# Altium PCB Multimodal.PcbDoc (part 3 of 3)
Units mil, origin at the board's own origin, x right, y up, seen from the top; angles counter-clockwise.
Board outline 1182.8 x 2149.26 mil, 6 copper layers (L1_TOP, L2_GND, L3_Signal, L4_PWR, L5_GND, L6_BOTTOM), stack 44.646 mil thick; 156 components, 97 nets, 528 pads, 619 vias.
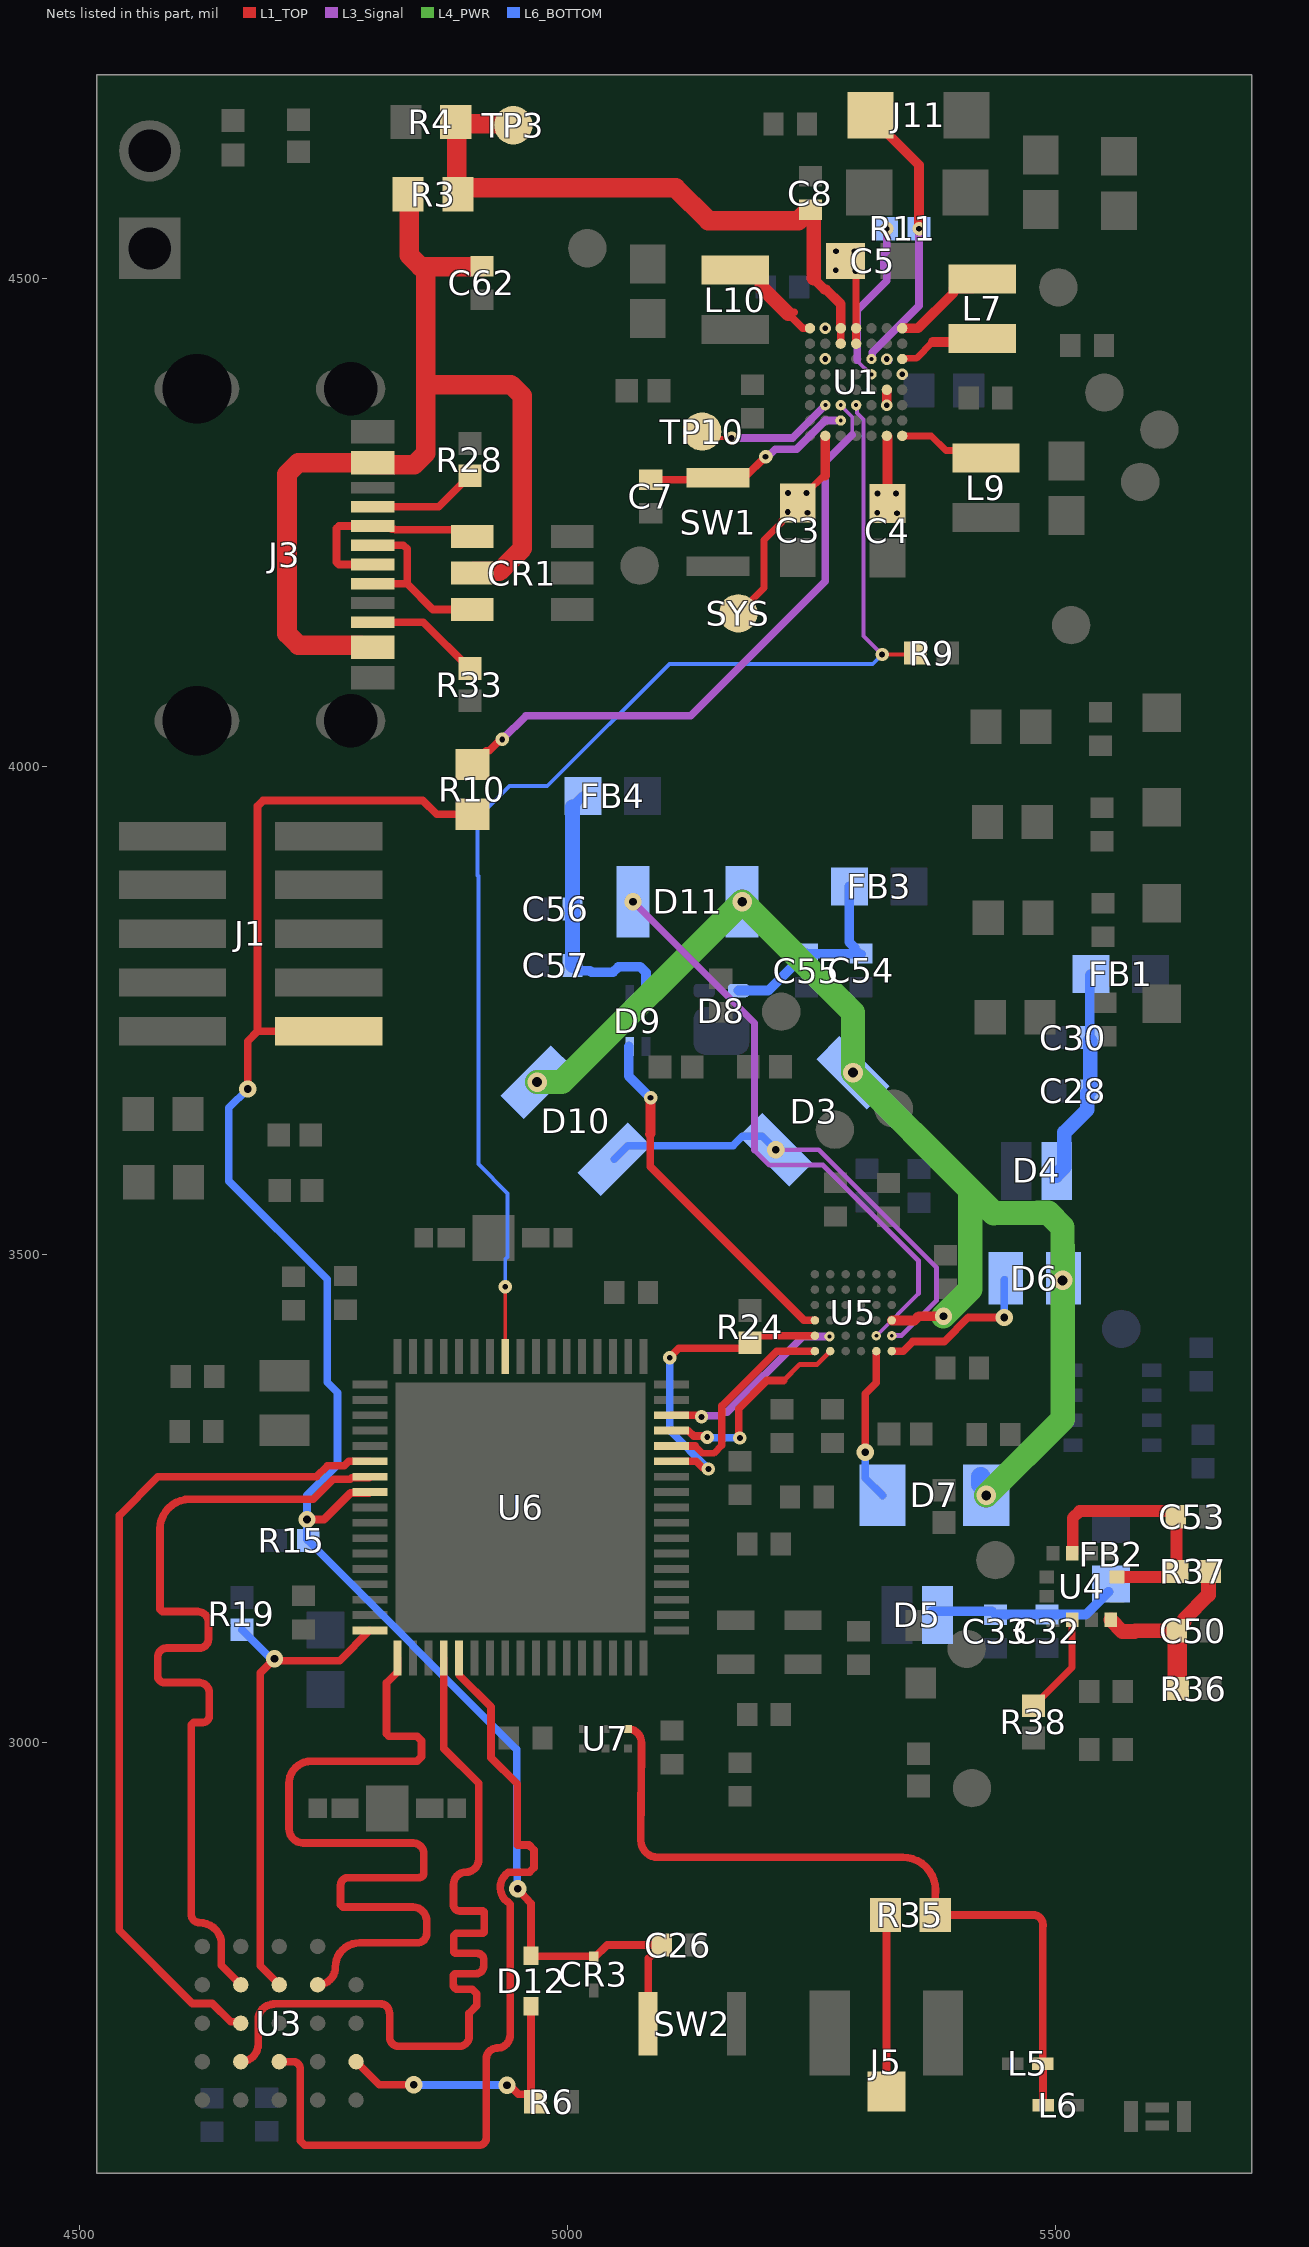
[diagram p7: the nets of this part, all layers, seen from the top]

## Via types
v1: diameter 17.72, hole 7.87, L1_TOP to L6_BOTTOM, tented both sides, 216 vias
v2: diameter 13.78, hole 5.91, L1_TOP to L6_BOTTOM, tented both sides, 93 vias
v3: diameter 17.72, hole 9.84, L1_TOP to L6_BOTTOM, 66 vias
v4: diameter 9.84, hole 3.94, L1_TOP to L2_GND, tented top, 49 vias
v5: diameter 20, hole 10, L1_TOP to L6_BOTTOM, tented both sides, 48 vias
v6: diameter 17.72, hole 7.87, L1_TOP to L6_BOTTOM, 46 vias
v7: diameter 9.84, hole 3.94, L2_GND to L3_Signal, tented top, 40 vias
v8: diameter 20, hole 12, L1_TOP to L6_BOTTOM, tented both sides, 30 vias
v9: diameter 11.81, hole 5.91, L3_Signal to L4_PWR, 20 vias
v10: diameter 11.81, hole 5.91, L1_TOP to L6_BOTTOM, tented both sides, 5 vias
v11: diameter 9.84, hole 3.94, L1_TOP to L2_GND, tented both sides, 3 vias
v12: diameter 17.72, hole 9.84, L1_TOP to L6_BOTTOM, tented both sides, 3 vias

## Nets (pads, with @x,y where several pads share a name; then routed paths per layer and width w, separated by ;. In a path a pad name is that pad's centre, name@x,y a point inside that pad or via, vN(x,y) a via of type N, cw(c..) or ccw(c..) an arc to the next point about the centre after c; other vN are vias at no path point) (continued)
NetJ3_A5: J3.A5 R28.2 | length 112.7
  L1_TOP w7.87: J3.A5@4800.48,4265.71 4868.05,4265.71 4899.8,4297.46 R28.2@4900,4297.46
NetJ3_B5: J3.B5 R33.2 | length 119.2
  L1_TOP w7.87: J3.B5@4800.48,4147.6 4852.28,4147.6 4899.8,4100.07 R33.2@4900,4100.07
NetL7_1: L7.1 U1.A1 | length 105.2
  L1_TOP w10: U1.A1@5342.9,4448.63 5359,4448.63 5395.35,4484.98 5395.35,4489.05 5414.86,4489.05 L7.1@5424.86,4499.05
NetL7_2: L7.2 U1.A3 | length 90.7
  L1_TOP w7: U1.A3@5342.9,4417.13 5343.6,4417.83 5357.29,4417.83 5374.09,4434.63
  L1_TOP w10: 5374.09,4434.63 5421.35,4434.63 L7.2@5424.86,4438.15
NetL9_1: L9.1 U1.A8 | length 73.4
  L1_TOP w7: U1.A8@5342.9,4338.39 5372.63,4338.39 5387.78,4323.25 5400.87,4323.25 L9.1@5407.37,4316.75
NetL10_2: L10.2 U1.G1 | length 113.4
  L1_TOP w7.87: 5226.24,4463.48 5227.83,4465.07 5231.97,4465.07
  L1_TOP w8: 5226.24,4463.48 5241.08,4448.64 U1.G1@5248.41,4448.63
  L1_TOP w15: L10.2@5171.86,4508.27 5191.38,4508.27 5198.88,4500.77 5198.88,4490.85 5226.24,4463.48
NetR10_2: R10.2 U1.E6 | length 636
  L1_TOP w4: R10.2@4902.6,4001.68 R10.2@4916.6,4015.68
  L1_TOP w7.87: R10.2@4916.6,4015.68 4919.81,4015.68 4931.53,4027.4 v2(4933.13,4027.4)
  L3_Signal w4: v4(5279.92,4369.92) 5279.91,4369.5 5291.72,4357.69 5291.72,4339.42
  L3_Signal w7.87: v2(4933.13,4027.4) 4957.54,4051.81 5126.32,4051.81 5264.16,4189.65 5264.16,4311.86 5291.72,4339.42
  other v7: 5279.92,4369.92
NetR24_1: R24.1 U5.A2 U6.46 | length 336.9
  L1_TOP w4: R24.1@5186.8,3409.24 R24.1@5186.99,3409.24
  L1_TOP w7.87: v2(5104.81,3394.1) 5104.81,3394.58 5114.01,3403.79 5186.77,3403.79 R24.1@5189.61,3406.63 ; U6.46@5106.39,3287.89 5132.02,3287.89 5138.75,3281.16 5143.26,3281.16 v2(5144.39,3280.03) ; R24.1@5192.23,3409.24 R24.1@5186.99,3409.24 5194.28,3416.53 U5.A2@5253.46,3416.53
  L6_BOTTOM w7.87: v2(5104.81,3394.1) 5104.81,3319.61 v2(5144.39,3280.03)
NetR38_2: R38.2 U4.8 | length 104.5
  L1_TOP w7: R38.2@5477.71,3037.57 5516.73,3076.58 U4.8@5516.73,3125.27
  L1_TOP w12: R38.2@5477.51,3037.57 R38.2@5477.71,3037.57 ; U4.8@5516.73,3125.27 U4.8@5517.04,3125.59
NetTP10_1: TP10.1 U1.F6 | length 142.9
  L1_TOP w4: TP10.1@5137.97,4342.84 5144.65,4336.16 v2(5168.08,4336.16)
  L3_Signal w7.87: v2(5168.08,4336.16) 5230.43,4336.16 v7@5264.16,4369.89
  other v4: 5264.13,4369.92
  other v7: 5264.13,4369.92
NetU5_A1: U5.A1 U6.47 | length 217
  L1_TOP w7: 5130.82,3303.56 5138.23,3296.15 5149.85,3296.15 5158.14,3304.44
  L1_TOP w7.87: U6.47@5106.39,3303.64 5106.47,3303.56 5130.82,3303.56 ; 5158.14,3304.44 5158.14,3344.52 5214.41,3400.78 U5.A1@5253.46,3400.78
NetU5_B1: U5.B1 U6.48 | length 222.4
  L1_TOP w5: 5221.34,3370.73 5237.88,3387.27 5255.69,3387.27 U5.B1@5269.2,3400.78
  L1_TOP w7.87: U6.48@5106.39,3319.39 5106.47,3319.31 5123.77,3319.31 5129.25,3313.83 5141.97,3313.83 v2(5143.1,3312.7) ; v2(5176.67,3311.79) 5175.27,3313.19 5175.27,3341.78 5204.22,3370.73 5221.34,3370.73
  L6_BOTTOM w7.87: v2(5143.1,3312.7) 5143.76,3312.04 5176.42,3312.04 v2(5176.67,3311.79)
NetU5_B2: U5.B2 U6.49 | length 196.8
  L1_TOP w7.87: U6.49@5106.39,3335.14 5133.94,3335.14 5135.66,3333.41 v2(5137.26,3333.41)
  L3_Signal w7.87: v2(5137.26,3333.41) 5138.31,3334.46 5155.96,3334.46 5159.89,3338.4 5163.78,3338.4 5241.11,3415.72 v7(5268.41,3415.72)
  other v4: 5268.41,3415.72
PD1_SPO2: D3.2 D10.2 U5.F2 | length 490.1
  L1_TOP w7.87: U5.F2@5332.2,3416.53 U5.F2@5332.2,3416.53
  L3_Signal w5: v1(5213.43,3607.13) 5257.19,3607.13 5377.82,3486.5 5377.82,3452.45 5341.98,3416.61 v4(5332.13,3416.61)
  L6_BOTTOM w7.87: D10.2@5047.88,3597.41 5061.75,3611.27 5169.49,3611.27 5179.22,3621 5199.57,3621 v1(5213.43,3607.13)
  other v7: 5332.13,3416.61
PD2_SPO2: D11.2 U5.E2 | length 615.9
  L3_Signal w4: v7@5316.45,3416.53 5359.56,3459.64 ; 5330.35,3521.57 5330.35,3521.69
  L3_Signal w5: 5191.4,3606.76 5206.87,3591.29 5261.7,3591.29 5359.56,3493.43 5359.56,3459.64
  L3_Signal w7: v1(5067.14,3861.22) 5191.4,3736.96 5191.4,3606.76
  other v4: 5316.45,3416.46
  other v7: 5316.45,3416.46
PD_CO2: D7.2 U5.E1 | length 159.9
  L1_TOP w7.87: v1(5305.02,3297.26) 5305.02,3356.93 5316.45,3368.36 U5.E1@5316.45,3400.78
  L6_BOTTOM w7.87: v1(5305.02,3297.26) 5305.02,3270.57 D7.2@5322.66,3252.93
PD_O2: D6.2 U5.F1 | length 170
  L1_TOP w7.87: U5.F1@5332.41,3400.78 5343.98,3400.78 5353.75,3410.55 5386.01,3410.55 5410.75,3435.29 v1(5447.38,3435.29)
  L6_BOTTOM w4.71: D6.2@5447.38,3473.79 D6.2@5448.97,3475.38
  L6_BOTTOM w7.87: v1(5447.38,3435.29) D6.2@5447.38,3473.79
PFN1: C7.1 SW1.2 U1.E7 | length 224.1
  L1_TOP w7.87: C7.1@5085.29,4293.58 5147.97,4293.58 SW1.2@5156.03,4301.64 ; SW1.2@5154.18,4295.4 5181.15,4295.4 5202.83,4317.08 v2(5202.89,4317.08)
  L3_Signal w7.87: v2(5202.89,4317.08) 5205.27,4317.08 5212.77,4324.58 5234.6,4324.58 5264.16,4354.14 v4(5279.92,4354.08)
  other v7: 5279.92,4354.08
PFN2: R9.1 U1.D6 U6.61 | length 1350.7
  L1_TOP w4: U6.61@4936.23,3395.05 v2(4936.23,3466.73) ; v2(5322.31,4114.4) 5355.23,4114.4 R9.1@5356.57,4115.75
  L3_Signal w4: v7@5295.66,4369.89 5296.76,4368.78 5296.76,4361.64 5303.26,4355.15 5303.26,4133.45 v2(5322.31,4114.4)
  L6_BOTTOM w4: v2(4936.23,3466.73) 4936.23,3495.03 4938.59,3497.39 4938.59,3562.4 4908.63,3592.35 4908.63,3887.37 4907.89,3888.12 4907.89,3946.95 4940.61,3979.67 4979.28,3979.67 5104.39,4104.78 5312.69,4104.78 v2(5322.31,4114.4)
  other v4: 5295.64,4369.92
  other v7: 5295.64,4369.92
QUAD_SPI_CSn: R19.1 U3.C2 U6.17 | length 505.3
  L1_TOP w7.87: U3.C2@4704.67,2751.63 4685.23,2771.07 4685.23,3071.06 v1(4699.8,3085.63) 4701.77,3083.66 4766.57,3083.66 U6.17@4797.57,3114.66
  L6_BOTTOM w7.87: R19.1@4666.34,3115.35 4666.54,3115.35 4696.26,3085.63 v1(4699.8,3085.63)
QUAD_SPI_IO0: U3.D3 U6.6 | length 868.5
  L1_TOP w7.87: U3.D3@4665.22,2712.64 4664.1,2713.76 4654.9,2713.76 4636.15,2732.51 4615.79,2732.51 4540.64,2807.66 4540.64,2839.48 4540.64,3232.31 4580.42,3272.09 4742.82,3272.09 4754.21,3283.48 4771.42,3283.48 4775.83,3287.89 U6.6@4797.57,3287.89
QUAD_SPI_IO1: U3.D2 U6.7 | length 882
  L1_TOP w7.87: U3.D2@4665.3,2751.63 4645.25,2771.68 4645.25,2797.43 ccw(c4623.02,2792.48) 4623.02,2815.26 cw(c4623.02,2823.71) 4614.56,2823.71 4614.56,3017.83 4617.09,3020.36 4626.28,3020.36 ccw(c4626.28,3027.18) 4633.09,3027.18 4633.09,3050.62 ccw(c4622.49,3050.62) 4622.49,3061.23 4586.94,3061.23 cw(c4586.94,3067.98) 4580.2,3067.98 4580.2,3087.15 cw(c4589.63,3087.15) 4589.63,3096.58 4622.89,3096.58 ccw(c4622.89,3105.89) 4632.2,3105.89 4632.2,3122.86 ccw(c4621.08,3122.86) 4621.08,3133.97 4585.04,3133.97 4582.51,3136.5 4582.51,3218.5 cw(c4613.1,3218.5) 4613.1,3249.09 4739.62,3249.09 4759.94,3269.41 4777.14,3269.41 4778.89,3271.16 4796.59,3271.16 U6.7@4797.57,3272.14
QUAD_SPI_IO2: U3.C4 U6.22 | length 873.3
  L1_TOP w4.31: 4940.76,2819.43 cw(c4936.92,2817.48) 4941.23,2817.51
  L1_TOP w5: 4948.4,2895.17 ccw(c4948.4,2896.4) 4949.63,2896.4
  L1_TOP w7.87: U3.C4@4704.67,2672.89 4718.79,2672.89 cw(c4718.79,2665.49) 4726.19,2665.49 4726.19,2591.87 4730.8,2587.26 4909.1,2587.26 ccw(c4909.1,2594.99) 4916.82,2594.99 4916.82,2675.79 cw(c4927.85,2675.79) 4927.85,2686.82 ccw(c4927.85,2700.2) 4941.23,2700.2 4941.23,2817.51 ; U6.22@4888.99,3086.24 4889.07,3086.16 4889.07,3068.86 4921.66,3036.26 4921.66,2984.29 4948.4,2957.56 4948.4,2896.4 4948.4,2895.17 ; 4938.15,2836.82 cw(c4949.63,2851.33) 4939.47,2866.79 4961,2866.79 4965.61,2871.4 4965.61,2889.81 4960.55,2894.87 4948.69,2894.87 ; 4938.69,2836.67 cw(c4933.62,2830.65) 4939.23,2836.17 4941.49,2833.87 4941.49,2817.42
QUAD_SPI_IO3: U3.D4 U6.21 | length 867.8
  L1_TOP w7.87: U3.D4@4665.3,2672.89 ccw(c4665.3,2690.74) 4683.16,2690.74 4683.16,2716 cw(c4698.77,2716) 4698.77,2731.6 ; 4698.4,2732.07 4698.77,2732.07 ; 4699.74,2732.12 4808.42,2732.12 cw(c4808.42,2723.1) 4817.44,2723.1 ; 4817.89,2722.47 4817.89,2697.53 ccw(c4826.7,2697.53) 4826.7,2688.72 4889.27,2688.72 ccw(c4889.27,2698.63) 4899.18,2698.63 4899.18,2722.58 4907.04,2730.43 4907.04,2742.56 4902.43,2747.17 4892.89,2747.17 4887.44,2747.17 cw(c4887.44,2751.53) 4883.08,2751.53 4883.08,2760.55 cw(c4885.61,2760.55) 4885.61,2763.07 4906.53,2763.07 ccw(c4906.53,2770.68) 4914.13,2770.68 4914.13,2777.17 ccw(c4907.45,2777.17) 4907.45,2783.85 4886.01,2783.85 cw(c4886.01,2786.37) 4883.49,2786.37 4883.49,2801.87 4886.01,2804.39 4912.33,2804.39 ccw(c4912.33,2806.92) 4914.86,2806.92 4914.86,2824.77 ccw(c4912.33,2824.77) 4912.33,2827.29 4889.52,2827.29 cw(c4889.52,2833.6) 4883.21,2833.6 4883.21,2854.26 cw(c4895.96,2854.26) 4895.96,2867 ccw(c4895.96,2879.99) 4908.95,2879.99 4908.95,2958.01 4873.24,2993.72 U6.21@4873.24,3086.24
QUAD_SPI_SCK: U3.B2 U6.18 | length 870.8
  L1_TOP w7.87: U3.B2@4744.04,2751.63 ccw(c4744.04,2769.78) 4762.2,2769.78 cw(c4787.02,2769.78) 4787.02,2794.6 4846.21,2794.6 ccw(c4846.21,2804.11) 4855.71,2804.11 4855.71,2817.03 ccw(c4841.49,2817.03) 4841.49,2831.26 4770.03,2831.26 4767.51,2833.78 4767.51,2853.53 cw(c4775.39,2853.53) 4775.39,2861.41 4847.85,2861.41 ccw(c4847.85,2866.46) 4852.9,2866.46 4852.9,2885.67 ccw(c4841.67,2885.67) 4841.67,2896.89 4729.56,2896.89 cw(c4729.56,2911.76) 4714.69,2911.76 4714.69,2957.92 cw(c4737.49,2957.92) 4737.49,2980.72 4845.81,2980.72 4850.42,2985.33 4850.42,3001.8 4845.81,3006.41 4817.15,3006.41 4814.63,3008.93 4814.63,3060.99 4826,3072.35 U6.18@4826,3086.24
RED: D9.2 U5.A3 | length 366.4
  L1_TOP w7.87: 5084.65,3622.94 5084.65,3589.89 5242.26,3432.28 U5.A3@5253.46,3432.28
  L1_TOP w10: 5084.65,3622.94 5085.06,3623.36 v2(5085.06,3660.3)
  L6_BOTTOM w10: D9.2@5062.71,3712.75 5062.71,3682.66 v2(5085.06,3660.3)
RF_CONN_IN: J5.1 R35.1 | length 181.1
  L1_TOP w7.87: J5.1@5326.73,2642.1 R35.1@5326.73,2823.18
RF_FIL_OUT: L5.1 L6.2 R35.2 U7.1 | length 778.9
  L1_TOP w7.87: U7.1@5061.89,3013.68 cw(c5061.89,2999.71) 5075.87,2999.71 5075.87,2998.59 5075.13,2899.58 ccw(c5092.43,2899.58) 5092.43,2882.28 5343.32,2882.28 cw(c5343.32,2848.61) 5376.99,2848.61 5376.99,2846.35 ; 5376.84,2845.76 R35.2@5376.84,2823.18 5469.21,2823.18 5477.08,2823.18 cw(c5477.08,2813.23) 5487.03,2813.23 5487.03,2812.33 ; 5486.88,2812.33 L5.1@5486.88,2670.62 5487.17,2670.34 5487.17,2628.58 L6.2@5487.45,2628.3
rst_flash: D12.2 R6.1 U3.A4 | length 292
  L1_TOP w7.87: U3.A4@4783.41,2672.89 4807.04,2649.26 v1@4840.5,2649.26 ; v1(4937.98,2648.61) 4940.64,2648.61 4949.83,2639.42 4959.31,2639.42 R6.1@4962.63,2636.09 ; D12.2@4962.63,2729.64 4962.63,2639.42 R6.1@4962.63,2636.09 ; R6.1@4966.88,2631.85 R6.1@4962.63,2636.09
  L6_BOTTOM w7.87: v1(4842.47,2649.26) 4842.79,2648.94 4937.65,2648.94 v1(4937.98,2648.61)
RST_MCU: C26.1 CR3.1 D12.1 J1.10 R10.1 R15.1 SW2.2 U6.8 | length 1946.8
  L1_TOP w7.87: v1(4672.35,3669.26) 4672.35,3718.31 4682.44,3728.4 ; v1(4733.07,3228.39) 4733.18,3228.27 4750.55,3228.27 4777.69,3255.41 4796.59,3255.41 U6.8@4797.57,3256.4 ; J1.10@4755.51,3728.4 4682.44,3728.4 ; R10.1@4902.6,3950.68 4865.97,3950.68 4851.79,3964.87 4688.14,3964.87 4682.44,3959.17 4682.44,3728.4 ; v1(4948.9,2850.06) 4962.63,2834.94 D12.1@4962.63,2781.61 ; D12.1@4963.37,2780.82 CR3.1@5027.05,2780.82 ; CR3.1@5027.05,2778.76 5040.68,2792.39 C26.1@5096.48,2792.39 5096.48,2791.01 5088.2,2782.73 5086.83,2782.73 5082.58,2778.49 SW2.2@5082.58,2711.88
  L6_BOTTOM w7.87: v1(4672.35,3669.26) 4653.08,3650 4653.08,3575.09 4753.84,3474.33 4753.84,3368.82 4764.45,3358.21 4764.45,3284.54 4733.07,3253.15 v1(4733.07,3228.39) 4733.07,3207.88 R15.1@4734.25,3206.69 4734.25,3206.5 4948.14,2992.61 4948.14,2874.65 ccw(c4956.01,2874.65) 4948.14,2874.41 v1(4948.9,2850.06)
SYS: C3.1 C4.1 C5.1 SYS.1 U1.A4 U1.B3 U1.B5 U1.B6 U1.B8 U1.D1 U1.D2 U1.F1 U1.F3 U1.F8 | length 436.5
  L1_TOP w7: SYS.1@5175.08,4156.57 5201.16,4182.65 5201.16,4231.77 5219.12,4249.73 5219.12,4251.31 5226.14,4258.33 C3.1@5226.14,4259.9 ; v9(5225.75,4260.3) 5235.06,4269.61 C3.1@5235.85,4269.61 ; C3.1@5235.85,4271.19 5244.51,4279.85 v4(5244.84,4279.85) ; C3.1@5245.3,4279.06 5245.3,4280.63 5262.59,4297.92 5264.16,4297.92 ; C5.1@5274.79,4526.97 C5.1@5284.55,4517.22 ; C5.1@5284.87,4517.54 5295.66,4506.75 U1.D1@5295.66,4448.63 ; C5.1@5288.47,4513.3 5288.47,4510.03 5293.55,4510.03 C5.1@5294.14,4509.44 ; C4.1@5327.72,4269.13 5327.72,4279.53 5336.68,4279.53 5338,4278.21 C4.1@5332.62,4272.83
  L1_TOP w8: U1.D2@5295.66,4432.88 U1.D1@5295.66,4448.63
  L1_TOP w10: 5264.16,4297.92 U1.F8@5264.16,4338.39 ; U1.B6@5326.6,4370.02 5327.03,4370.45 5327.03,4385.52 U1.B5@5327.15,4385.64 ; U1.B8@5327.44,4338.27 5327.27,4338.1 5327.72,4337.65 C4.1@5327.72,4279.53
  L3_Signal w10: v9(5327.15,4417.12) 5327.59,4416.67 v7@5327.59,4416.22 ; v7@5327.53,4416.15 v7@5327.59,4416.22 ; v7@5328.07,4416.22 v7@5327.59,4416.22
  other v4: 5337.56,4259.06 5225.75,4260.3 5245.93,4259.66 5317.38,4259.7 5317.6,4279.23 5336.47,4279.25 5225.97,4279.83 5327,4369.83 5342.89,4401.4 5264.13,4417.16 5327.15,4417.12 5264.13,4448.59 5295.08,4507.42 5274.89,4508.05 5275.12,4527.59 5293.99,4527.6
  other v7: 5337.56,4259.06 5225.75,4260.3 5245.93,4259.66 5317.38,4259.7 5317.6,4279.23 5336.47,4279.25 5225.97,4279.83 5244.84,4279.85 5327,4369.83 5342.89,4401.4 5264.13,4417.16 5327.15,4417.12 5264.13,4448.59 5295.08,4507.42 5274.89,4508.05 5275.12,4527.59 5293.99,4527.6
  other v9: 5337.56,4259.06 5245.93,4259.66 5317.38,4259.7 5317.6,4279.23 5336.47,4279.25 5225.97,4279.83 5244.84,4279.85 5327,4369.83 5342.89,4401.4 5264.13,4417.16 5264.13,4448.59 5295.08,4507.42 5274.89,4508.05 5275.12,4527.59 5293.99,4527.6
THM: J11.1 R11.2 U1.C3 | length 299.4
  L1_TOP w10: J11.1@5303.22,4672.8 5360.11,4615.91 v2(5360.11,4550.6)
  L3_Signal w7.87: v4(5311.36,4417.19) 5312.29,4418.11 5312.29,4423.83 5360.11,4471.66 v2(5360.11,4550.6)
  other v7: 5311.36,4417.19
TPU: R11.1 U1.C4 | length 170.7
  L3_Signal w4: 5296.86,4415.93 5296.86,4415.28 5310.78,4401.37 v4(5311.39,4401.37)
  L3_Signal w7.87: 5296.86,4415.93 5296.86,4466.99 5327.04,4497.16 5327.04,4507.53 5323.97,4510.61 5323.97,4524.47 5327.04,4527.54 v2(5327.04,4550.6)
  other v7: 5311.39,4401.37
USB_DN: CR1.4 J3.A7 J3.B7 | length 217.1
  L1_TOP w5.63: CR1.4@4895.62,4242.18 CR1.4@4902.56,4235.24
  L1_TOP w7.87: J3.A7@4800.48,4206.65 4765.91,4206.65 4763.39,4209.18 4763.39,4243.5 4765.91,4246.02 4816.98,4246.02 4820.17,4242.83 4822.81,4242.83 4823.47,4242.18 CR1.4@4895.62,4242.18
USB_DP: CR1.6 J3.A6 J3.B6 | length 190.3
  L1_TOP w7.87: J3.A6@4795.61,4226.34 4831.89,4226.34 4835.67,4222.56 4835.67,4186.97 ; J3.B6@4800.48,4186.97 4835.67,4186.97 ; CR1.6@4902.56,4160.43 4862.2,4160.43 4835.67,4186.97
USB_VBUS: C62.1 CR1.5 J3.A4/B9 J3.B4/A9 R3.2 | length 1063.2
  L1_TOP w20: J3.A4/B9@4800.05,4308.98 4843.16,4308.98 4854.88,4320.7 4854.88,4391 ; J3.B4/A9@4800.48,4122.01 4789.98,4122.01 4787.98,4124.01 4724.36,4124.01 4712.64,4135.72 4712.64,4299.27 4724.36,4310.98 J3.A4/B9@4800.48,4310.98 ; R3.2@4837.7,4584.89 4837.7,4523.57 4849.41,4511.85 4911.97,4511.85 C62.1@4912.4,4512.28 ; 4854.88,4511.85 4854.88,4391 ; CR1.5@4902.56,4197.83 4904.37,4199.65 4924.19,4199.65 4930.23,4199.67 4953.74,4223.18 4953.74,4379.28 4942.02,4391 4854.88,4391
VC1: D3.1 D6.1 D7.1 D10.1 D11.1 U5.F3 | length 1299.6
  L1_TOP w10: U5.F3@5332.2,3432.28 5355.48,3432.28 5359.72,3436.53 5385.09,3436.53 v1(5385.13,3436.57)
  L4_PWR w15: v5@5177.96,3860.26 v5(5178.92,3861.22)
  L4_PWR w25: v5(4968.84,3676.45) 4994.15,3676.45 v5@5177.96,3860.26 ; v5(5178.92,3861.22) 5292.47,3747.67 v5(5292.47,3686.17) 5412.75,3565.9 ; v1(5385.13,3436.57) 5412.75,3464.19 5412.75,3565.9 ; v5(5428.96,3252.93) 5507.17,3331.14 5507.17,3493.89 5507.07,3527.73 5492.42,3542.37 5481.97,3542.37 5436.64,3542.01 5412.75,3565.9
  L6_BOTTOM w20: D7.1@5423.32,3264.37 D7.1@5423.32,3272.25
  other v5: 5507.17,3473.18
VDDIO: C53.1 R37.1 U4.3 U4.12 | length 260.8
  L1_TOP w12: U4.3@5517.04,3193.59 5517.54,3194.09 5517.54,3229.88 5524.57,3236.91 5618.5,3236.91 5622.93,3232.47 C53.1@5622.93,3231.1 5623.78,3230.25 5623.78,3176.02 R37.1@5624.63,3175.18 ; U4.12@5562.88,3169.43 R37.1@5619.01,3169.43
VIN: C8.1 R3.1 R4.1 TP3.1 U1.E1 U1.E2 | length 654.3
  L1_TOP w8: U1.E2@5279.91,4432.88 U1.E1@5279.91,4448.63
  L1_TOP w10: 5252.37,4499.83 5252.37,4499.21 5263.11,4488.47 5264.95,4488.47 5279.91,4473.51 U1.E1@5279.91,4448.63
  L1_TOP w15: C8.1@5248.51,4565.7 5252.37,4561.84 5252.37,4499.83
  L1_TOP w20: R4.1@4885.64,4659.77 R4.1@4886.68,4658.73 ; R3.1@4886.68,4586.92 R4.1@4886.68,4658.73 ; R3.1@4887.71,4585.88 R3.1@4887.71,4587.38 ; R3.1@4892.8,4592.46 5110.8,4592.46 5144.29,4558.97 5236.53,4558.97 5247.05,4569.49 C8.1@5248.51,4569.49 ; TP3.1@4944.53,4656.66 4942.97,4658.22 4887.2,4658.22 R4.1@4886.68,4658.73
VLED_BLUE_CO2: C32.1 C33.1 D5.2 FB2.1 | length 186.3
  L6_BOTTOM w10: D5.2@5374.02,3134.34 C33.1@5435.12,3134.34 ; C33.1@5438.59,3130.87 C32.1@5491.14,3130.87 ; C32.1@5491.28,3131.01 5530.98,3131.01 FB2.1@5554.26,3154.29
VLED_BLUE_O2: C28.1 C30.1 D4.2 FB1.1 | length 217.7
  L6_BOTTOM w10: C30.1@5535.1,3721.93 5535.1,3786.01 FB1.1@5536.08,3786.99
  L6_BOTTOM w15: D4.2@5500.57,3580.75 5508.91,3589.09 5508.91,3624.68 5532.47,3648.24 5532.47,3664.53 C28.1@5535.4,3667.46 C30.1@5535.4,3718.52
VLED_GREEN: C54.1 C55.1 D8.2 FB3.1 | length 215
  L6_BOTTOM w10: D8.2@5175.17,3770.12 5205.71,3770.12 5243.66,3808.07 5245.04,3808.07 5245.34,3807.77 C54.1@5299.16,3807.77 ; FB3.1@5288.73,3876.82 5288.73,3819.57 5294.02,3814.28 5294.02,3812.9 C54.1@5299.16,3807.77 ; C54.1@5300.84,3807.47 5299.46,3807.47 C54.1@5299.16,3807.77
VLED_IR-RED: C56.1 C57.1 D9.3 FB4.1 | length 283.7
  L6_BOTTOM w10: C57.1@5005.06,3795.88 5005.06,3795.79 5010.5,3790.36 5023,3790.36 5024.39,3788.97 5046.72,3788.97 5052.24,3794.5 5074.57,3794.5 5080.42,3788.64 D9.3@5080.42,3765.9 ; FB4.1@5005.06,3958.47 FB4.1@5015.91,3969.32
  L6_BOTTOM w15: C57.1@5005.06,3795.88 C56.1@5005.06,3853.85 FB4.1@5005.06,3958.47
VS: C50.1 R36.1 R37.2 U4.10 | length 207
  L1_TOP w15: U4.10@5556.41,3125.59 5568.48,3113.52 5580.9,3113.52 5581.74,3114.36 C50.1@5624.03,3114.36 5626.97,3117.29 5626.97,3118.67 5631.74,3123.44 5631.74,3126.16 5656.6,3151.03 5656.6,3174.08 R37.2@5657.7,3175.18
  L1_TOP w20: R36.1@5624.29,3065.31 R36.1@5625.03,3064.56 ; R36.1@5624.47,3055.72 C50.1@5624.47,3113.92
pads on no net: AE1. AE1.1 D9.1 J1.07 J1.08 J3.13 J3.14 J3.15 J3.16 J3.A8 J3.B8 U1.C6 U1.C7 U1.C8 U1.D3 U1.D7 U1.F4 U1.F5 U1.F7 U1.G4 U1.G5 U1.G8 U3.A2 U3.A3 U3.A5 U3.B1 U3.B5 U3.C1 U3.C3 U3.C5 U3.D1 U3.D5 U3.E1 U3.E2 U3.E3 U3.E5 U5.C2 U5.E4 U5.E5 U5.E6 U5.F6 U6.2 U6.9 U6.10 U6.11 U6.12 U6.15 U6.16 U6.19 U6.20 U6.23 U6.24 U6.25 U6.26 U6.27 U6.28 U6.29 U6.36 U6.37 U6.51 U6.57 U6.58 U6.59 U6.60 U6.62 U6.65

## Polygon pours and split planes (outlines as drawn)
GND on L1_TOP "GND_L01_P018" (solid, pour order 18): 4519.39,4704.19 4518.86,4703.66 4518.86,2555.77 5698.07,2555.77 5702.47,2551.36 5702.47,4704.94
3V3D on L1_TOP "3V3D_L01_P008" (solid, pour order 8): 5373.61,4091.75 5368.38,4096.97 5368.38,4286.02 5560.75,4286.02 5560.75,4091.36
GND on L1_TOP "GND_L01_P007" (solid, pour order 7): 5373.62,4704.91 5373.62,4549.37 5373.61,4549.37 5445.08,4549.37 5445.08,4588.89 5453.78,4597.59 5455.01,4596.36 5693.53,4596.36 5693.86,4596.69 5693.86,4705.7
GND on L1_TOP "GND_L01_P005" (solid, pour order 5): 5229.3,4617.64 5229.3,4704.39 5157.48,4704.39 5157.48,4586.63 5268.21,4586.63 5268.21,4617.64
GND on L1_TOP "GND_L01_P003" (solid, remove dead copper, pour order 3): 4526,4450 4526,4591 4598,4591 4629,4622 4629,4635 4636,4642 4799,4642 4812,4629 4812,4450
GND on L1_TOP "GND_L01_P001" (solid, pour order 1): 4688.97,4322 4822,4322 4822,4438 ccw(c4810,4438) 4810,4450 4526,4450 4526,3977 4810,3977 4810,3982 4825,3997 4825,4099 4690.98,4099
3V3D on L4_PWR "3V3D_L04_P021" (solid, pour order 21): 4520.39,4708.61 4519.86,4708.08 4519.86,2560.18 5703.7,2560.18 5707.02,4709.44
SYS on L4_PWR "SYS_L04_P010" (solid, pour order 10): 5360.11,4545.69 5359.78,4545.36 5359.78,4242.78 5352.47,4235.46 5204.85,4235.46 5204.85,4302.7 5226.74,4324.58 5230.16,4324.58 5230.16,4465.07 5234.46,4469.37 5257.52,4469.37 5257.52,4543.28 5255.1,4545.69
GND on L5_GND "GND_L05_P022" (solid, pour order 22): 4516.02,4709.3 4515.74,4709.58 4515.74,2560.32 5692.06,2560.04 5698.82,2560.04 5698.82,4709.3
GND on L6_BOTTOM "GND_L06_P023" (solid, pour order 23): 4516.4,4707.1 4515.88,4706.58 4515.88,2558.68 5695.08,2558.68 5698.79,2554.98 5698.79,4707.85
GND on L2_GND "GND_L02_P019" (solid, pour order 19): 4516.75,4706.64 4516.22,4706.11 4516.22,2558.21 5695.43,2558.21 5704,2549.63 5704,4707.39
GND on L3_Signal "GND_L03_P020" (solid, pour order 20): 4518.76,4710.58 4518.24,4710.05 4518.24,2562.15 5697.44,2562.15 5700.36,2559.24 5700.36,4711.33

## Other copper
L1_TOP:
  pour cut-out: 5506.33,2635.47 5505.95,2635.09 5505.95,2618.45 5522.97,2618.45 5530.08,2611.34 5566.85,2611.34 5566.85,2597.69 5566.81,2597.64 5566.96,2597.49 5586,2597.49 5586,2634.22 5585.28,2634.95 5568.26,2634.95 5568.26,2623.26 5567.58,2622.58 5537.47,2622.58 5530.64,2629.41 5530.64,2635.57 5530.43,2635.78
  pour cut-out: 5066.4,3005.54 5058.63,3005.54 cw(c5058.63,3008.68) 5055.49,3008.68 5055.49,3019.37 cw(c5057.16,3019.37) 5057.16,3021.05 5065.26,3021.05 cw(c5065.26,3018.84) 5067.48,3018.83 5067.48,3017.8 ccw(c5069.23,3017.8) 5069.23,3016.05 cw(c5070.21,3003.94) 5082.26,3005.54 5082.26,2902.76 ccw(c5095.85,2902.75) 5095.85,2889.17 5344.59,2888.32 cw(c5347.26,2851.05) 5384.53,2853.71 5391.92,2848.83 5412.82,2830.55 5482.47,2828.62 cw(c5482.47,2819.58) 5491.51,2819.58 5492.91,2693.25 ccw(c5504.88,2692.42) 5504.06,2680.45 cw(c5504.06,2678.57) 5505.93,2678.57 5505.93,2661.05 cw(c5504.06,2661.05) 5504.06,2659.17 5492.91,2659.17 5492.91,2638.83 5499,2638.83 cw(c5499,2635.37) 5502.47,2635.37 5502.47,2618.35 cw(c5499.74,2618.34) 5499.73,2615.61 5475.4,2615.61 cw(c5475.4,2619.06) 5471.95,2619.06 5471.95,2636.02 cw(c5474.23,2636.02) 5474.23,2638.3 5477.97,2638.3 ccw(c5477.97,2642.75) 5482.41,2642.75 5482.41,2657.66 ccw(c5481.19,2657.66) 5481.19,2658.89 5474.52,2658.89 cw(c5474.52,2662.22) 5471.19,2662.22 5471.19,2675.38 cw(c5476.22,2675.38) 5476.22,2680.41 ccw(c5475.05,2685.59) 5480.22,2686.76 5481.19,2809.97 ccw(c5474.49,2810.28) 5474.77,2816.98 5412.49,2816.98 ccw(c5412.49,2815.05) 5410.56,2815.05 5410.56,2802.09 cw(c5406.89,2802.07) 5406.87,2798.4 5353.68,2798.4 5353.96,2847.5 5367.95,2848.05 ccw(c5367.95,2850.21) 5370.12,2850.21 5370.12,2851.95 ccw(c5345.77,2851.09) 5344.89,2875.44 5091.46,2875.44 cw(c5091.46,2897.66) 5069.23,2897.67 5069.23,3004.05 ccw(c5067.31,3004.06) 5067.3,3005.98 5066.85,3005.76
  pour cut-out: 5087.78,3816.05 5088.11,3816.05 5093.75,3821.7 5093.75,3904.5 5091.98,3904.5 5087.62,3908.86 5041.5,3908.86 5037.15,3904.5 5037.15,3824.52 5045.37,3816.29
  pour cut-out: 5000.48,3579.47 5000.5,3579.65 5001.03,3586.84 5058.42,3644.23 5075.64,3644.23 5083.42,3636.45 5179.02,3636.45 5196.33,3653.76 5202.68,3653.76 5260.4,3596.05 5260.4,3589.54 5221.13,3550.27 5029.56,3550.27 5000.5,3579.34 5000.48,3579.41
  pour cut-out: 5286.04,3214.68 5294.68,3206.04 5356.27,3206.04 5356.6,3205.71 5369.17,3218.28 5369.17,3290.21 5431.69,3352.74 5440.84,3352.74 5440.84,3353.07 5483.84,3396.08 5483.81,3396.11 5483.81,3430.74 5477.98,3436.57 5477.98,3505.77 5470.53,3513.22 5427.9,3513.22 5418.2,3503.52 5418.2,3426.23 5426.88,3417.55 5426.88,3411.34 5408.77,3393.23 5393.8,3393.23 5325.31,3324.74 5307.89,3324.74 5285.6,3302.45 5285.6,3215.06
  pour cut-out: 5303.41,2618.05 5349.13,2617.99 5348.86,2665.32 5332.7,2665.64 5333.35,2801.02 5347.71,2800.95 5347.84,2846.02 5304.35,2845.81 5304.31,2801.7 5320.64,2801.73 5320.11,2664.89 5303.64,2664.83
  pour cut-out: 5552.09,2828.21 5552.09,2591.47 5653.89,2591.47 5654.98,2592.56 5654.98,2827.99
  pour cut-out: 5021.23,3014.71 5028.6,3022.02 5028.53,3053.24 5034.06,3058.91 5034.17,3066.12 5037.31,3066.07 5036.93,3106.48 5024.49,3106.48 5024.39,3066.26 5027.86,3066.26 5027.9,3061.65 5022.28,3055.99 5022.41,3024.71 5016.3,3018.63 5011.03,3018.67 5010.99,3009.33 5021.13,3009.19
  pour cut-out: 5548.12,2590.75 5548.12,2569.67 5686.14,2569.67 5686.14,2590.86 5686.03,2590.75
  pour cut-out: 5653.51,2839.19 5687.08,2839.19 5687.08,2590.06 5653.51,2590.06
L3_Signal:
  pour cut-out: 5087.3,3816.09 5087.62,3816.09 5093.27,3821.73 5093.27,3904.54 5091.49,3904.54 5087.14,3908.89 5041.02,3908.89 5036.66,3904.54 5036.66,3824.55 5044.89,3816.33
  pour cut-out: 5000.98,3579.62 5000.99,3579.8 5001.53,3587 5058.92,3644.39 5076.14,3644.39 5083.92,3636.61 5179.51,3636.61 5196.83,3653.92 5203.18,3653.92 5260.89,3596.21 5260.89,3589.7 5221.62,3550.43 5030.06,3550.43 5000.99,3579.49 5000.97,3579.56
  pour cut-out: 5285.8,3215.73 5294.44,3207.09 5356.03,3207.09 5356.36,3206.76 5368.93,3219.33 5368.93,3291.26 5431.45,3353.79 5440.6,3353.79 5440.6,3354.13 5483.6,3397.13 5483.57,3397.16 5483.57,3431.79 5477.74,3437.62 5477.74,3506.82 5470.3,3514.27 5427.66,3514.27 5417.96,3504.57 5417.96,3427.28 5426.64,3418.6 5426.64,3412.39 5408.53,3394.28 5393.56,3394.28 5325.08,3325.79 5307.65,3325.79 5285.36,3303.5 5285.36,3216.11
  pour cut-out: 5552.09,2828.43 5552.09,2591.69 5653.89,2591.69 5654.98,2592.78 5654.98,2828.21
L4_PWR:
  pour cut-out: 5506.41,2635.55 5506.02,2635.17 5506.02,2618.53 5523.04,2618.53 5530.15,2611.42 5566.93,2611.42 5566.93,2597.76 5566.89,2597.72 5567.04,2597.57 5586.08,2597.57 5586.08,2634.3 5585.36,2635.03 5568.34,2635.03 5568.34,2623.33 5567.66,2622.66 5537.55,2622.66 5530.72,2629.49 5530.72,2635.65 5530.51,2635.85
  pour cut-out: 5066.33,3005.61 5058.56,3005.61 cw(c5058.56,3008.75) 5055.42,3008.75 5055.42,3019.44 cw(c5057.08,3019.44) 5057.09,3021.12 5065.19,3021.12 cw(c5065.19,3018.91) 5067.41,3018.9 5067.41,3017.87 ccw(c5069.16,3017.87) 5069.16,3016.12 cw(c5070.14,3004.01) 5082.19,3005.61 5082.19,2902.83 ccw(c5095.78,2902.83) 5095.78,2889.24 5344.52,2888.39 cw(c5347.19,2851.12) 5384.46,2853.78 5391.85,2848.9 5412.75,2830.62 5482.4,2828.69 cw(c5482.4,2819.65) 5491.44,2819.65 5492.84,2693.32 ccw(c5504.81,2692.49) 5503.99,2680.52 cw(c5503.99,2678.64) 5505.86,2678.64 5505.86,2661.12 cw(c5503.99,2661.12) 5503.99,2659.24 5492.84,2659.24 5492.84,2638.9 5498.93,2638.9 cw(c5498.93,2635.44) 5502.4,2635.44 5502.4,2618.42 cw(c5499.67,2618.41) 5499.66,2615.68 5475.33,2615.68 cw(c5475.33,2619.13) 5471.88,2619.13 5471.88,2636.09 cw(c5474.16,2636.09) 5474.16,2638.37 5477.9,2638.37 ccw(c5477.9,2642.82) 5482.34,2642.82 5482.34,2657.73 ccw(c5481.12,2657.73) 5481.12,2658.96 5474.45,2658.96 cw(c5474.45,2662.29) 5471.12,2662.29 5471.12,2675.45 cw(c5476.14,2675.45) 5476.14,2680.48 ccw(c5474.98,2685.66) 5480.15,2686.83 5481.12,2810.04 ccw(c5474.42,2810.35) 5474.7,2817.05 5412.42,2817.05 ccw(c5412.42,2815.12) 5410.49,2815.12 5410.49,2802.16 cw(c5406.82,2802.15) 5406.8,2798.47 5353.61,2798.47 5353.89,2847.57 5367.88,2848.12 ccw(c5367.88,2850.28) 5370.05,2850.28 5370.05,2852.02 ccw(c5345.7,2851.16) 5344.82,2875.51 5091.39,2875.51 cw(c5091.39,2897.73) 5069.16,2897.74 5069.16,3004.44 ccw(c5067.39,3004.29) 5067.23,3006.05 5066.78,3005.83
  pour cut-out: 5087.19,3816.05 5087.51,3816.05 5093.15,3821.7 5093.15,3904.5 5091.38,3904.5 5087.03,3908.86 5040.9,3908.86 5036.55,3904.5 5036.55,3824.52 5044.78,3816.29
  pour cut-out: 5001.03,3579.42 5001.04,3579.6 5001.58,3586.79 5058.97,3644.18 5076.19,3644.18 5083.97,3636.4 5179.57,3636.4 5196.88,3653.72 5203.23,3653.72 5260.95,3596 5260.95,3589.49 5221.68,3550.23 5030.11,3550.23 5001.04,3579.29 5001.03,3579.36
  pour cut-out: 5287.4,3215.15 5296.04,3206.51 5357.63,3206.51 5357.96,3206.18 5370.53,3218.75 5370.53,3290.69 5433.05,3353.21 5442.2,3353.21 5442.2,3353.55 5485.2,3396.55 5485.17,3396.59 5485.17,3431.22 5479.34,3437.05 5479.34,3506.25 5471.89,3513.69 5429.26,3513.69 5419.56,3503.99 5419.56,3426.7 5428.24,3418.02 5428.24,3411.81 5410.13,3393.7 5395.16,3393.7 5326.67,3325.22 5309.25,3325.22 5286.95,3302.92 5286.95,3215.54
  pour cut-out: 5303.28,2617.8 5349,2617.73 5348.74,2665.07 5332.6,2665.39 5333.25,2800.76 5347.58,2800.69 5347.71,2845.76 5304.22,2845.55 5304.19,2801.45 5320.51,2801.48 5319.98,2664.63 5303.51,2664.57
  pour cut-out: 5552,2827.9 5552,2591.16 5653.8,2591.16 5654.89,2592.25 5654.89,2827.68
L2_GND:
  pour cut-out: 5087.41,3816.1 5087.73,3816.1 5093.38,3821.75 5093.38,3904.56 5091.6,3904.56 5087.25,3908.91 5041.13,3908.91 5036.77,3904.56 5036.77,3824.57 5045,3816.34
  pour cut-out: 5000.69,3579.35 5000.71,3579.53 5001.24,3586.73 5058.63,3644.12 5075.85,3644.12 5083.63,3636.34 5179.23,3636.34 5196.54,3653.65 5202.89,3653.65 5260.61,3595.94 5260.61,3589.43 5221.34,3550.16 5029.77,3550.16 5000.71,3579.22 5000.69,3579.29
  pour cut-out: 5285.8,3214.33 5294.44,3205.69 5356.03,3205.69 5356.36,3205.37 5368.93,3217.93 5368.93,3289.87 5431.45,3352.4 5440.6,3352.4 5440.6,3352.73 5483.6,3395.74 5483.57,3395.77 5483.57,3430.4 5477.74,3436.23 5477.74,3505.43 5470.3,3512.88 5427.66,3512.88 5417.96,3503.18 5417.96,3425.88 5426.64,3417.2 5426.64,3410.99 5408.53,3392.88 5393.56,3392.88 5325.08,3324.4 5307.65,3324.4 5285.36,3302.1 5285.36,3214.72
  pour cut-out: 5552.31,2828.21 5552.31,2591.47 5654.11,2591.47 5655.2,2592.56 5655.2,2827.99
L5_GND:
  pour cut-out: 5087.37,3815.91 5087.69,3815.91 5093.34,3821.55 5093.34,3904.36 5091.56,3904.36 5087.21,3908.71 5041.09,3908.71 5036.73,3904.36 5036.73,3824.37 5044.96,3816.15
  pour cut-out: 5001.42,3579.33 5001.43,3579.51 5001.97,3586.71 5059.36,3644.1 5076.57,3644.1 5084.35,3636.32 5179.95,3636.32 5197.27,3653.63 5203.62,3653.63 5261.33,3595.92 5261.33,3589.41 5222.06,3550.14 5030.49,3550.14 5001.43,3579.21 5001.41,3579.28
  pour cut-out: 5286.03,3214.42 5294.67,3205.78 5356.27,3205.78 5356.6,3205.46 5369.16,3218.02 5369.16,3289.96 5431.69,3352.49 5440.83,3352.49 5440.83,3352.82 5483.84,3395.83 5483.81,3395.86 5483.81,3430.49 5477.98,3436.32 5477.98,3505.52 5470.53,3512.97 5427.89,3512.97 5418.19,3503.27 5418.19,3425.97 5426.88,3417.29 5426.88,3411.08 5408.77,3392.97 5393.8,3392.97 5325.31,3324.49 5307.89,3324.49 5285.59,3302.19 5285.59,3214.81
  pour cut-out: 5552,2828.5 5552,2591.76 5653.8,2591.76 5654.89,2592.85 5654.89,2828.28
L6_BOTTOM:
  pour cut-out: 5506.37,2635.47 5505.98,2635.09 5505.98,2618.45 5523.01,2618.45 5530.12,2611.34 5566.89,2611.34 5566.89,2597.69 5566.85,2597.64 5567,2597.49 5586.04,2597.49 5586.04,2634.22 5585.32,2634.95 5568.3,2634.95 5568.3,2623.26 5567.62,2622.58 5537.51,2622.58 5530.68,2629.41 5530.68,2635.57 5530.47,2635.78
  pour cut-out: 5066.4,3005.54 5058.63,3005.54 cw(c5058.63,3008.68) 5055.49,3008.68 5055.49,3019.37 cw(c5057.16,3019.37) 5057.16,3021.05 5065.26,3021.05 cw(c5065.26,3018.84) 5067.48,3018.83 5067.48,3017.8 ccw(c5069.23,3017.8) 5069.23,3016.05 cw(c5070.21,3003.94) 5082.26,3005.54 5082.26,2902.76 ccw(c5095.85,2902.75) 5095.85,2889.17 5344.59,2888.32 cw(c5347.26,2851.05) 5384.53,2853.71 5391.92,2848.83 5412.82,2830.55 5482.47,2828.62 cw(c5482.47,2819.58) 5491.51,2819.58 5492.91,2693.25 ccw(c5504.88,2692.42) 5504.06,2680.45 cw(c5504.06,2678.57) 5505.93,2678.57 5505.93,2661.05 cw(c5504.06,2661.05) 5504.06,2659.17 5492.91,2659.17 5492.91,2638.83 5499,2638.83 cw(c5499,2635.37) 5502.47,2635.37 5502.47,2618.35 cw(c5499.74,2618.34) 5499.73,2615.61 5475.4,2615.61 cw(c5475.4,2619.06) 5471.95,2619.06 5471.95,2636.02 cw(c5474.23,2636.02) 5474.23,2638.3 5477.97,2638.3 ccw(c5477.97,2642.75) 5482.41,2642.75 5482.41,2657.66 ccw(c5481.19,2657.66) 5481.19,2658.89 5474.52,2658.89 cw(c5474.52,2662.22) 5471.19,2662.22 5471.19,2675.38 cw(c5476.22,2675.38) 5476.22,2680.41 ccw(c5475.05,2685.59) 5480.22,2686.76 5481.19,2809.97 ccw(c5474.49,2810.28) 5474.77,2816.98 5412.49,2816.98 ccw(c5412.49,2815.05) 5410.56,2815.05 5410.56,2802.09 cw(c5406.89,2802.07) 5406.87,2798.4 5353.68,2798.4 5353.96,2847.5 5367.95,2848.05 ccw(c5367.95,2850.21) 5370.12,2850.21 5370.12,2851.95 ccw(c5345.77,2851.09) 5344.89,2875.44 5091.46,2875.44 cw(c5091.46,2897.66) 5069.23,2897.67 5069.39,3003.89 ccw(c5067.31,3003.91) 5067.3,3005.98 5066.85,3005.76
  pour cut-out: 5087.37,3816.16 5087.69,3816.16 5093.33,3821.8 5093.33,3904.61 5091.56,3904.61 5087.2,3908.97 5041.08,3908.97 5036.73,3904.61 5036.73,3824.63 5044.95,3816.4
  pour cut-out: 5000.74,3579.8 5000.75,3579.98 5001.29,3587.18 5058.68,3644.57 5075.9,3644.57 5083.68,3636.79 5179.27,3636.79 5196.59,3654.1 5202.94,3654.1 5260.65,3596.39 5260.65,3589.88 5221.38,3550.61 5029.82,3550.61 5000.75,3579.68 5000.73,3579.75
  pour cut-out: 5286.2,3215.76 5294.84,3207.12 5356.44,3207.12 5356.77,3206.8 5369.33,3219.36 5369.33,3291.3 5431.86,3353.82 5441,3353.82 5441,3354.16 5484.01,3397.17 5483.98,3397.2 5483.98,3431.83 5478.15,3437.66 5478.15,3506.86 5470.7,3514.3 5428.06,3514.3 5418.36,3504.61 5418.36,3427.31 5427.05,3418.63 5427.05,3412.42 5408.94,3394.31 5393.96,3394.31 5325.48,3325.83 5308.06,3325.83 5285.76,3303.53 5285.76,3216.15
  pour cut-out: 5303.25,2617.8 5348.97,2617.73 5348.7,2665.07 5332.76,2665.38 5333.4,2800.76 5347.55,2800.69 5347.68,2845.76 5304.19,2845.55 5304.15,2801.45 5320.48,2801.48 5319.95,2664.63 5303.48,2664.57
  pour cut-out: 5552.3,2827.9 5552.3,2591.16 5654.1,2591.16 5655.19,2592.25 5655.19,2827.68
  pour cut-out: 5021.2,3014.62 5028.56,3021.93 5028.5,3053.15 5034.02,3058.83 5034.13,3066.03 5037.28,3065.99 5036.9,3106.4 5024.46,3106.4 5024.36,3066.18 5027.83,3066.18 5027.87,3061.56 5022.24,3055.9 5022.38,3024.62 5016.27,3018.55 5010.99,3018.58 5010.96,3009.24 5021.1,3009.1

## Silkscreen, mask and mechanical layers (free items; w line width, h text height)
Top Overlay:
  drawing of 86 lines, arcs and shapes, not listed
  text "VIN" at 4982.82,4638.24 h59.06
  text "IVMON" at 4972.78,4324.31 h30
  text "EXCP" at 5676.83,4024.13 h30 r90
  text "IMPIP" at 5677.27,3928 h30 r90
  text "IMPIN" at 5677.27,3828.18 h30 r90
  text "EXCN" at 5676.83,3729.58 h30 r90
  text "0001" at 5615.33,3510.56 h59.06 r90
  text "SCOT" at 5543.33,3498.22 h59.06 r90
  text "INT" at 5468.06,3080.67 h30 r90
  text "RST" at 5083.32,2623.28 h59.06
Bottom Overlay:
  drawing of 14 lines, arcs and shapes, not listed
  text "O2" at 5397.62,3522.15 h59.06 r90
  text "CO2" at 5245.47,3241.93 h59.06 r90

## Text inside footprints (layer, text, board x,y; h text height)
D12: Mechanical 13 "*" at 4938.03,2794.01 h50 r270
J3: Mechanical 13 "*" at 4775.48,4454.98 h50 r270; Top Overlay "*" at 4775.48,4454.98 h50 r270
U1: Mechanical 13 "8" at 5374.4,4321.66 h15; Mechanical 13 "1" at 5375.38,4439.77 h15; Mechanical 13 "A" at 5323.49,4499.23 h30 r270; Mechanical 13 "G" at 5206.46,4499.27 h30 r270; Top Overlay "8" at 5372.68,4322.19 h15; Top Overlay "1" at 5374.09,4434.63 h15; Top Overlay "G" at 5225.09,4486.6 h15 r270; Top Overlay "A" at 5371.38,4460.49 h15
U3: Mechanical 13 "E" at 4600.93,2880.26 h30 r270; Mechanical 13 "A" at 4758.41,2880.26 h30 r270; Top Overlay "FLASH" at 4539.98,2949.47 h19.68 r270; Top Overlay "5" at 4885.78,2605.96 h30; Top Overlay "E" at 4600.93,2880.26 h30 r270; Top Overlay "A" at 4758.41,2880.26 h30 r270; Top Overlay "1" at 4882.82,2778.2 h30